# Altium PCB PCB1.PcbDoc
Units mm, origin at the board's own origin, x right, y up, seen from the top; angles counter-clockwise.
Board outline 17 x 42 mm, 2 copper layers (Top Layer, Bottom Layer); 15 components, 13 nets, 52 pads, 0 vias.
Unrouted connection lines stored in the file: 26.
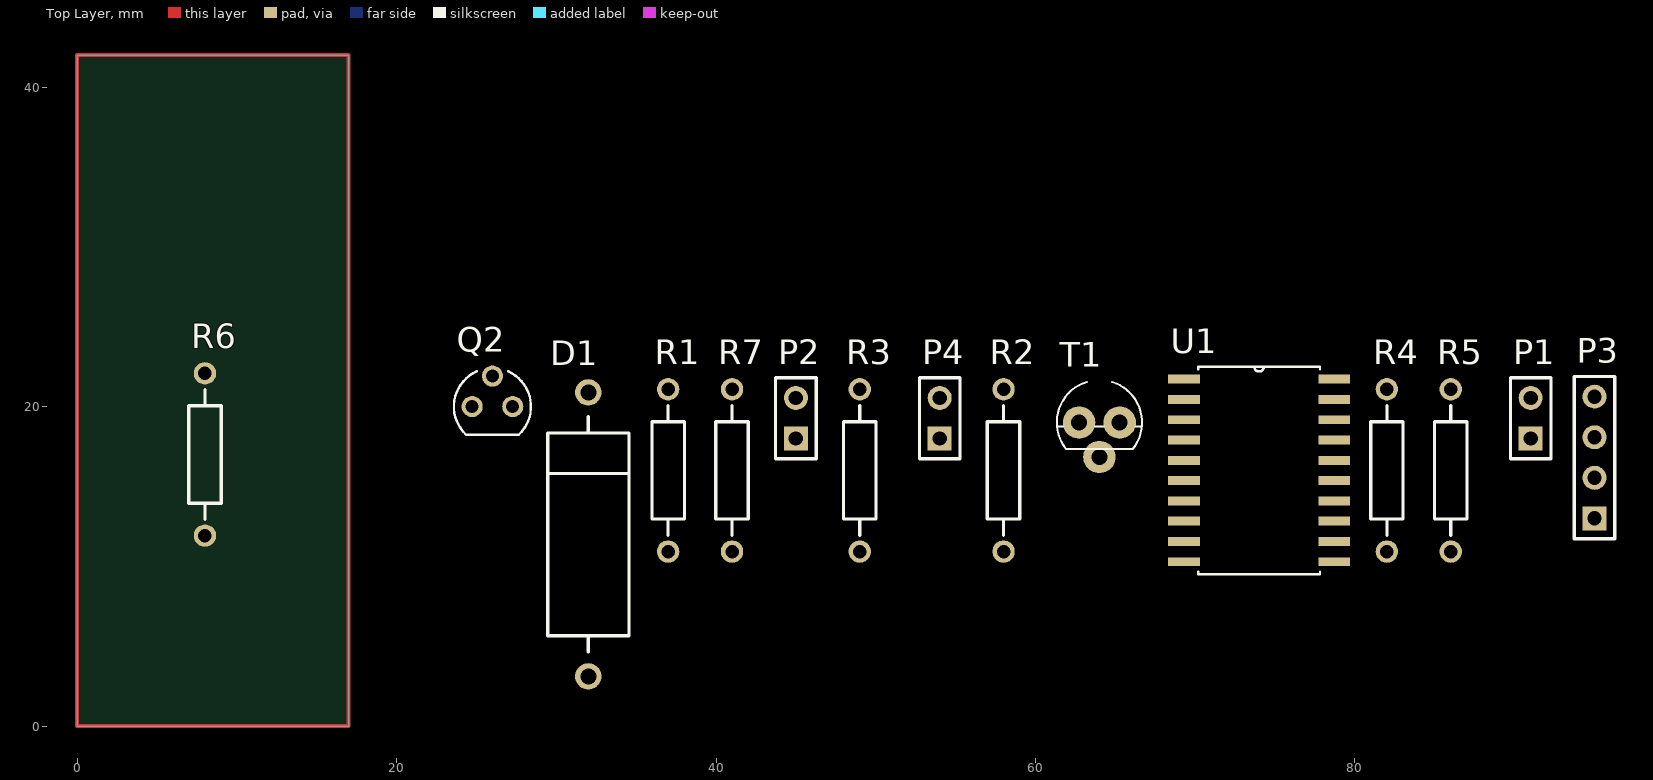
[diagram p0: Top Layer view]
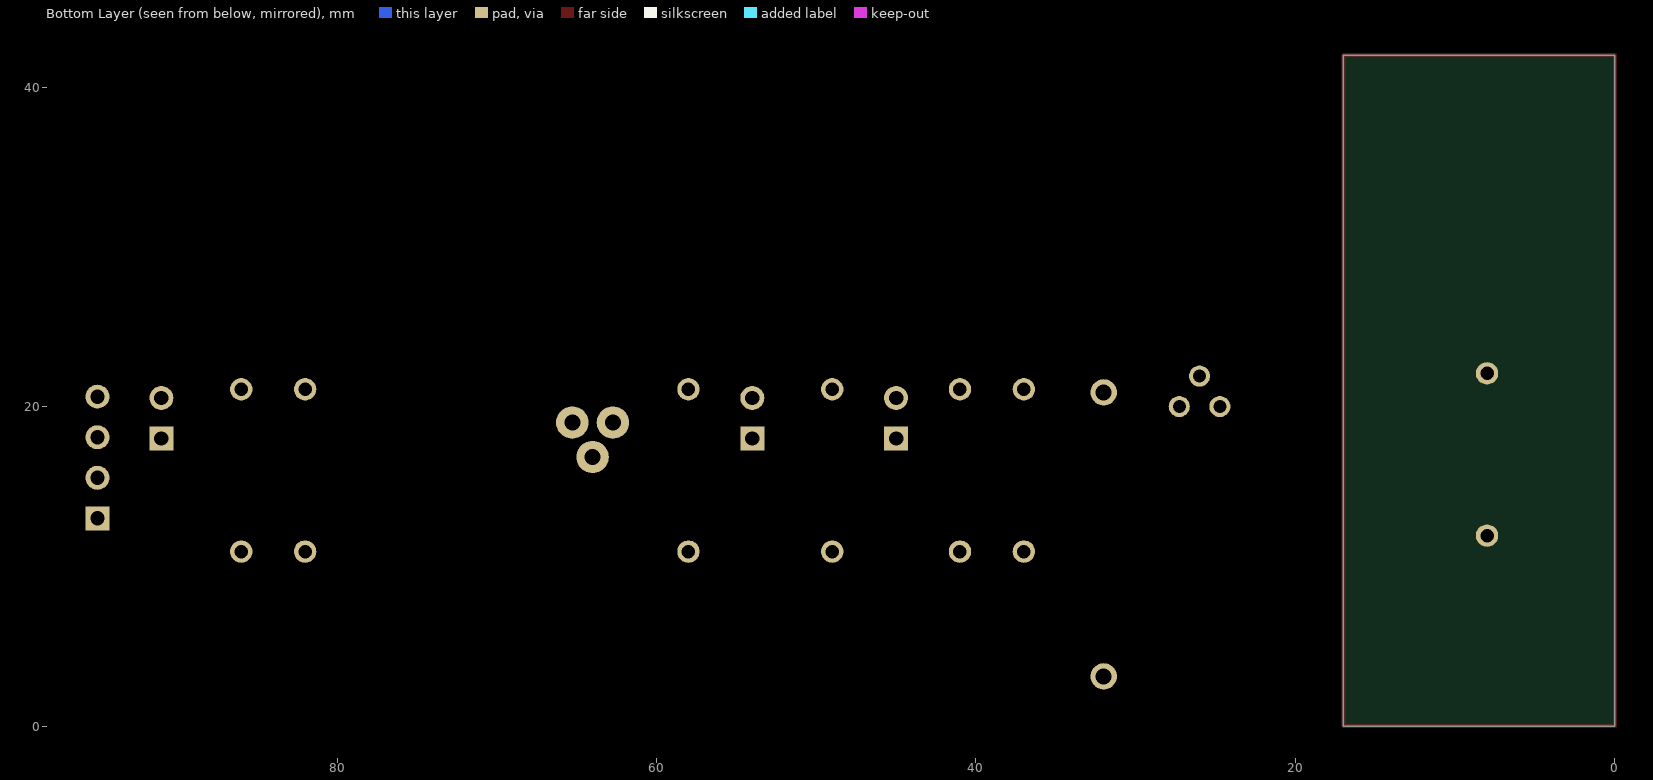
[diagram p1: Bottom Layer view, seen from below]

## Layer stack, top to bottom
Top Solder: solder mask 0.0102, Solder Resist, Dk 3.5
Top Layer: signal copper 0.0356
Dielectric 1: dielectric 0.32, FR-4, Dk 4.8
Bottom Layer: signal copper 0.0356
Bottom Solder: solder mask 0.0102, Solder Resist, Dk 3.5

## Board outline
0,0 17,0 17,42 0,42

## Design rules (kind name [scope] priority, off if disabled: settings)
Clearance [All] p1: gap=0.254 ignorepadtopadclearanceinfootprint=FALSE except(0: Arc-Hole Track-Hole SMDPad-Hole THPad-Hole Via-Hole Fill-Hole Poly-Hole Region-Hole Text-Hole)
PolygonConnect [All] p1: connectstyle=Relief reliefconductorwidth=0.254 reliefentries=4 polygonreliefangle="90 Angle" airgapwidth=0.254
RoutingVias [All] p1: holewidth=0.711 width=1.27 viastyle="Through Hole" minholewidth=0.711 minwidth=1.27 maxholewidth=0.711 maxwidth=1.27
SolderMaskExpansion [All] p1: expansion=0.102 istentingtop=FALSE
Width [All] p1: maxlimit=0.254 minlimit=0.254 preferedwidth=0.254
30 further rules are at their usual default settings.

## Components (designator, comment, footprint, x,y, rotation, side; value= is the part's Value field where it differs from the comment)
D1 "D Zener" DIODE-0.7 32,12 r90 top
P1 "BAT" HDR1X2 91,18 r90 top
P2 "LED" HDR1X2 45,18 r90 top
P3 "Header 4" HDR1X4 95,13 r90 top
P4 "CONT" HDR1X2 54,18 r90 top
Q2 "BC557" SOT54A 26,20 r0 top
R1 "Res2" AXIAL-0.4 37,16 r90 top
R2 "Res2" AXIAL-0.4 58,16 r90 top
R3 "Res2" AXIAL-0.4 49,16 r90 top
R4 "Res2" AXIAL-0.4 82,16 r90 top
R5 "Res2" AXIAL-0.4 86,16 r90 top
R6 "Res2" AXIAL-0.4 8,17 r90 top
R7 "Res2" AXIAL-0.4 41,16 r90 top
T1 "BC547" TO92 64,19 r0 top
U1 "ATTINY2313-20SUR" SOIC127P1032X265-20N 74,16 r0 top

## Footprints (in the part's own frame and the unit in brackets; to place one, negate y for a bottom-side part, rotate by r counter-clockwise, add the part's x,y. Pads: shape width x height; smd on the part's side, far side on the other; paste and mask are expansions set on the pad)
AXIAL-0.4 [mm] "Axial Device, Thru-Hole; 2 Leads; 0.4 in Pin Spacing"
  round 1.4 hole 0.85: 1(-5.08,0) 2(5.08,0)
  silkscreen extent -4.06,-1.02 4.06,1.02
DIODE-0.7 [mm] "Diode, Thru-Hole; 2 Leads; 0.7 in Pin Spacing"
  round 1.65 hole 1: 1(-8.89,0) 2(8.89,0)
  silkscreen extent -7.37,-2.54 7.37,2.54
HDR1X2 [mm] "Connector; Header; 2 Position"
  rect 1.5x1.5 hole 0.9: 1(0,0)
  round 1.5 hole 0.9: 2(2.54,0)
  silkscreen extent -1.27,-1.27 3.81,1.27
HDR1X4 [mm] "Connector; Header; 4 Position"
  rect 1.5x1.5 hole 0.9: 1(0,0)
  round 1.5 hole 0.9: 2(2.54,0) 3(5.08,0) 4(7.62,0)
  silkscreen extent -1.27,-1.27 8.89,1.27
SOIC127P1032X265-20N [mil]
  rect 78x22 smd: 1(-185,225) 2(-185,175) 3(-185,125) 4(-185,75) 5(-185,25) 6(-185,-25) 7(-185,-75) 8(-185,-125) 9(-185,-175) 10(-185,-225) 11(185,-225) 12(185,-175) 13(185,-125) 14(185,-75) 15(185,-25) 16(185,25) 17(185,75) 18(185,125) 19(185,175) 20(185,225)
  silkscreen extent -150,-256 150,256
SOT54A [mil]
  round 52 hole 32: B(0,75) C(-50,0) E(50,0)
  silkscreen extent -95,-70 95,87, body extent -94,-60 94,94, height 305
TO92 [mil]
  round 80 hole 39.37: 1(50,0) 2(0,-85) 3(-50,0)
  silkscreen extent -105,-65 105,100

## Part data
D1: "Zener Diode", LatestRevisionDate=17-Jul-2002, LatestRevisionNote="Re-released for DXP Platform.", PackageDescription="Diode, Thru-Hole; 2 Leads; 0.7 in Pin Spacing", PackageReference=DIODE-0.7, Published=8-Jun-2000, Publisher="Altium Limited"
P1 P2 P4: library part "Header 2", "Header, 2-Pin", LatestRevisionDate=17-Jul-2002, LatestRevisionNote="Re-released for DXP Platform.", Publisher="Altium Limited"
P3: "Header, 4-Pin", LatestRevisionDate=17-Jul-2002, LatestRevisionNote="Re-released for DXP Platform.", Publisher="Altium Limited"
Q2: "Bipolar (BJT) Transistor PNP 45 V 100 mA 320MHz 625 mW Through Hole TO-92 (TO-226)", Package="E-PKG AXIAL-LEADED-2 ON Semiconductor", Availability="In Stock", Check_prices=https://www.snapeda.com/parts/BC557/Onsemi/view-part/?ref=eda, MF="ON Semiconductor", MP=BC557, Price=None, Purchase-URL=https://pricing.snapeda.com/search/part/BC557/?ref=eda, SnapEDA_Link=https://www.snapeda.com/parts/BC557/Onsemi/view-part/?ref=snap
R1 R2 R3 R4 R5 R6 R7: library part CRGCQ1206J10K, "Fixed Resistor CRGCQ 1206 10K 5%", Package="3115 TE Connectivity", Availability=Warning, DigiKey-Purchase-URL=https://snapeda.com/shop?store=DigiKey&id=3188341, MF="TE Connectivity", Mouser-Purchase-URL=https://snapeda.com/shop?store=Mouser&id=3188341, MP=CRGCQ1206J10K, Price=None, SnapEDA_Link=https://www.snapeda.com/parts/CRGCQ1206J10K/TE%20Connectivity/view-part/3188341/?ref=snap
T1: "Trans GP BJT NPN 45V 0.1A 500mW 3-Pin TO-92 T/R", Package=None, Availability="In Stock", Check_prices=https://www.snapeda.com/parts/BC547/Onsemi/view-part/?ref=eda, MF="ON Semiconductor", MP=BC547, Price=None, Purchase-URL=https://pricing.snapeda.com/search/part/BC547/?ref=eda, SnapEDA_Link=https://www.snapeda.com/parts/BC547/Onsemi/view-part/?ref=snap
U1: "AVR series Microcontroller IC 8-Bit 20MHz 2KB (1K x 16) FLASH 20-SOIC", Package="SOIC-20 Microchip Technology", Availability="In Stock", Check_prices=https://www.snapeda.com/parts/ATTINY2313-20SUR/Microchip/view-part/?ref=eda, MF="Microchip Technology", MP=ATTINY2313-20SUR, Price=None, Purchase-URL=https://pricing.snapeda.com/search/part/ATTINY2313-20SUR/?ref=eda, SnapEDA_Link=https://www.snapeda.com/parts/ATTINY2313-20SUR/Microchip/view-part/?ref=snap

## Nets (pads, with @x,y where several pads share a name; then routed paths per layer and width w, separated by ;. In a path a pad name is that pad's centre, name@x,y a point inside that pad or via, vN(x,y) a via of type N, cw(c..) or ccw(c..) an arc to the next point about the centre after c; other vN are vias at no path point)
GND: P1.2 P2.2 P4.2 Q2.C R3.1 R6.1 T1.1 U1.10
NetD1_1: D1.1 Q2.B R6.2
NetD1_2: D1.2
NetP2_1: P2.1 R1.1
NetP3_2: P3.2 T1.3
NetP3_3: P3.3 U1.2
NetP3_4: P3.4 U1.3
NetP4_1: P4.1 R4.1 U1.6
NetQ2_E: Q2.E R5.1 R7.1 U1.7
NetR1_2: R1.2 U1.5
NetR2_1: R2.1 R3.2 T1.2
NetR2_2: R2.2 U1.4
VCC: P1.1 P3.1 R4.2 R5.2 U1.20
pads on no net: R7.2 U1.1 U1.8 U1.9 U1.11 U1.12 U1.13 U1.14 U1.15 U1.16 U1.17 U1.18 U1.19
copper on no net: | length 118
  Top Layer w0.254: 0,0 0,42 17,42 17,0 0,0

## Text inside footprints (layer, text, board x,y; h text height)
T1: Mechanical 13 "2" at 63.365,19.635 h1.27; Mechanical 13 "3" at 61.841,19 h1.27; Mechanical 13 "1" at 65.143,19 h1.27